# Altium PCB Kivipallur_plaat.PcbDoc
Units mm, origin at the board's own origin, x right, y up, seen from the top; angles counter-clockwise.
Board outline 64.78 x 80 mm, 4 copper layers (Top Layer, GND, GND_M, Bottom Layer), stack 1.586 mm thick; 108 components, 69 nets, 364 pads, 341 vias.
Unrouted connection lines stored in the file: 5.
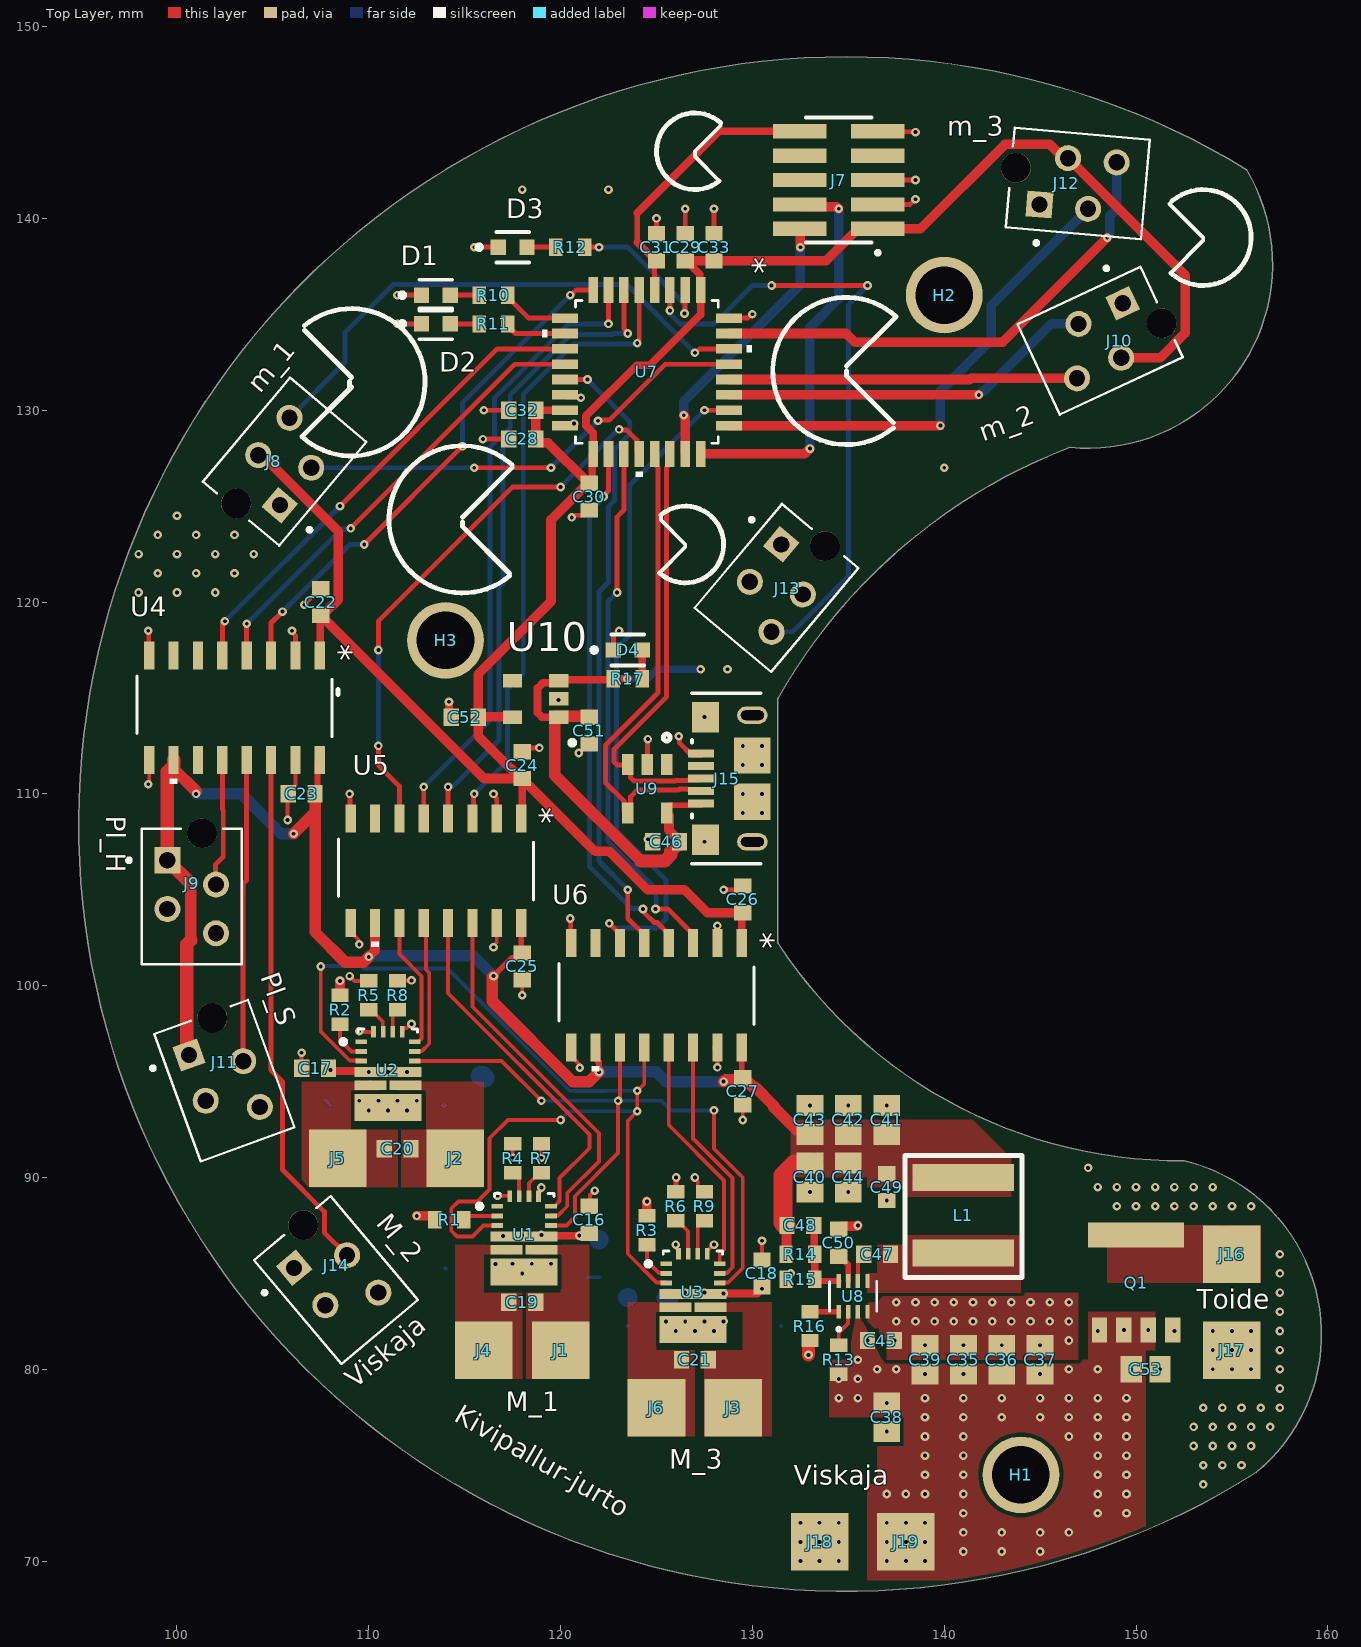
[diagram p0: Top Layer view]
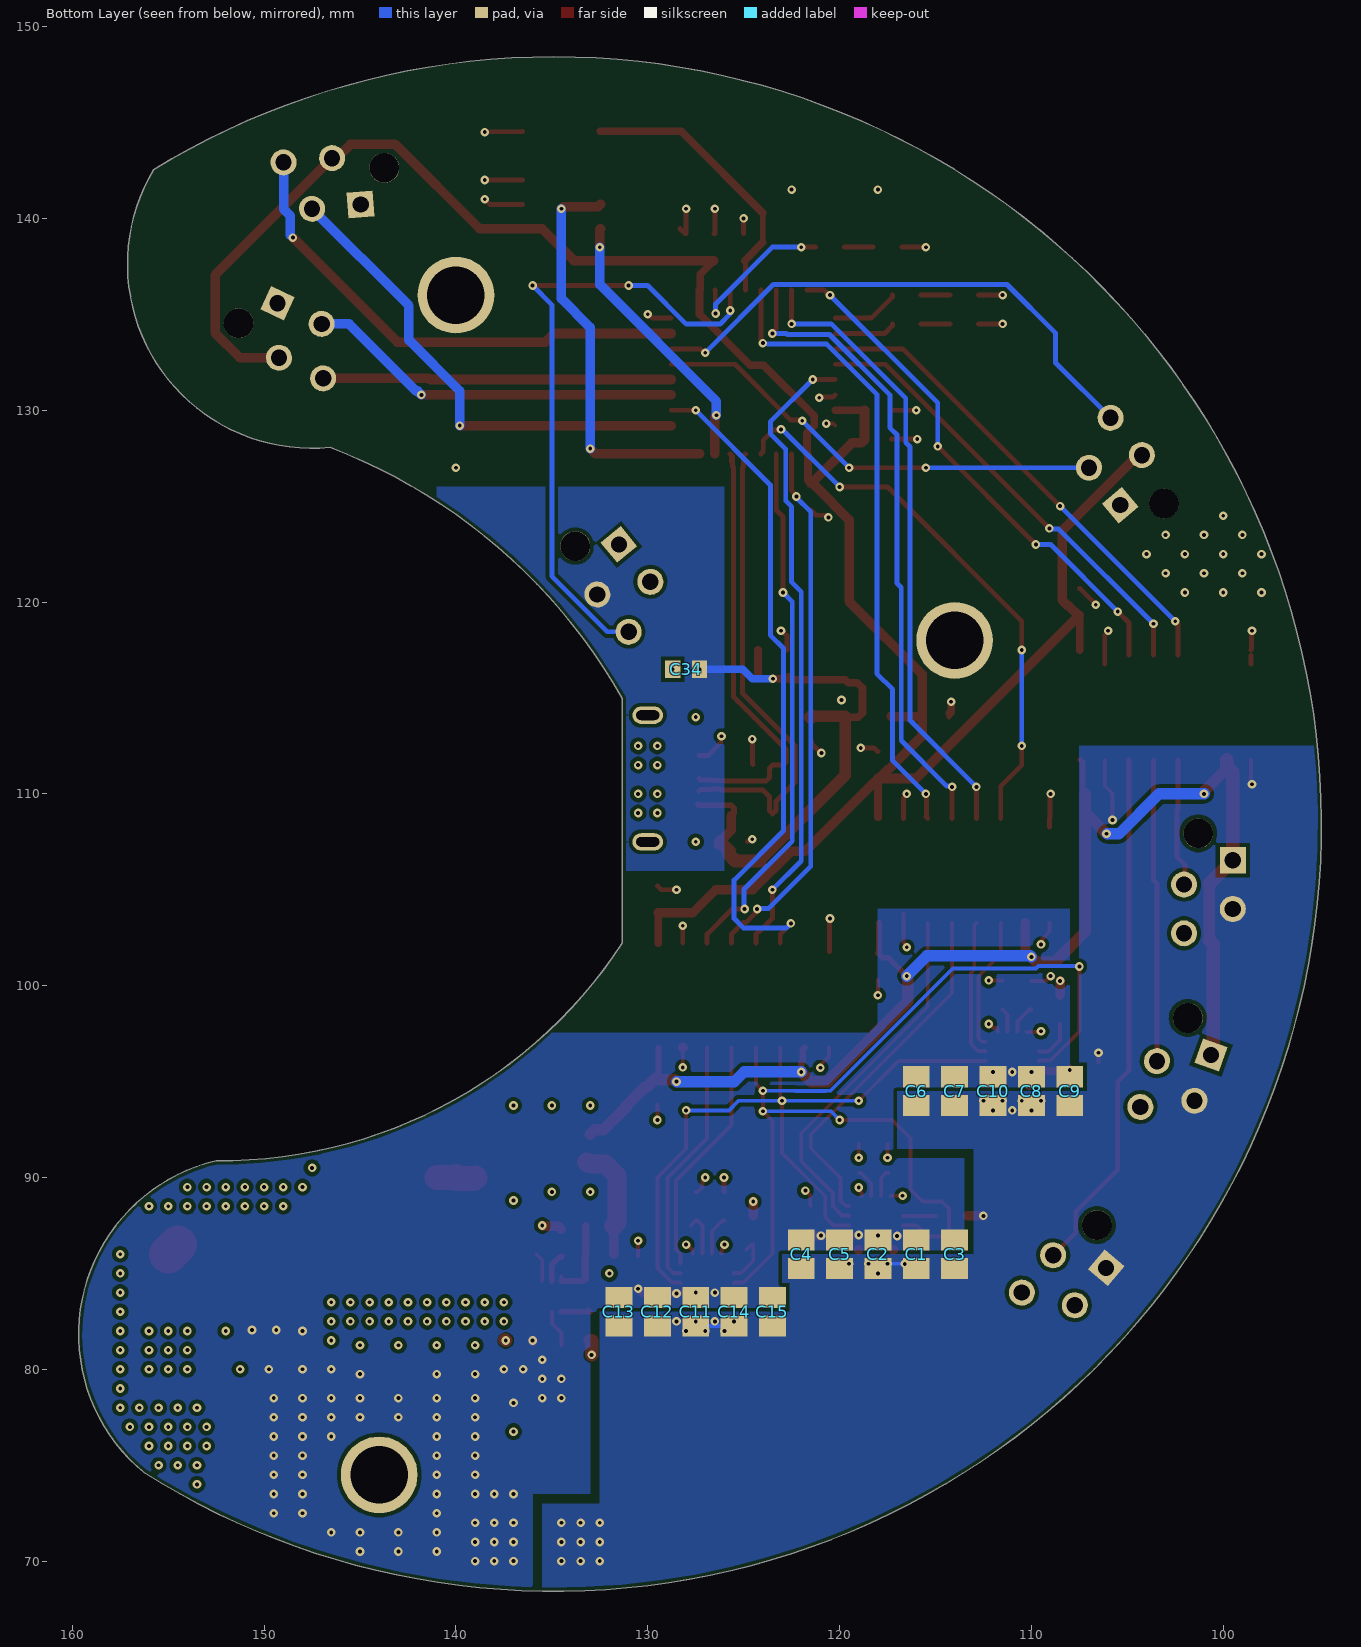
[diagram p1: Bottom Layer view, seen from below]
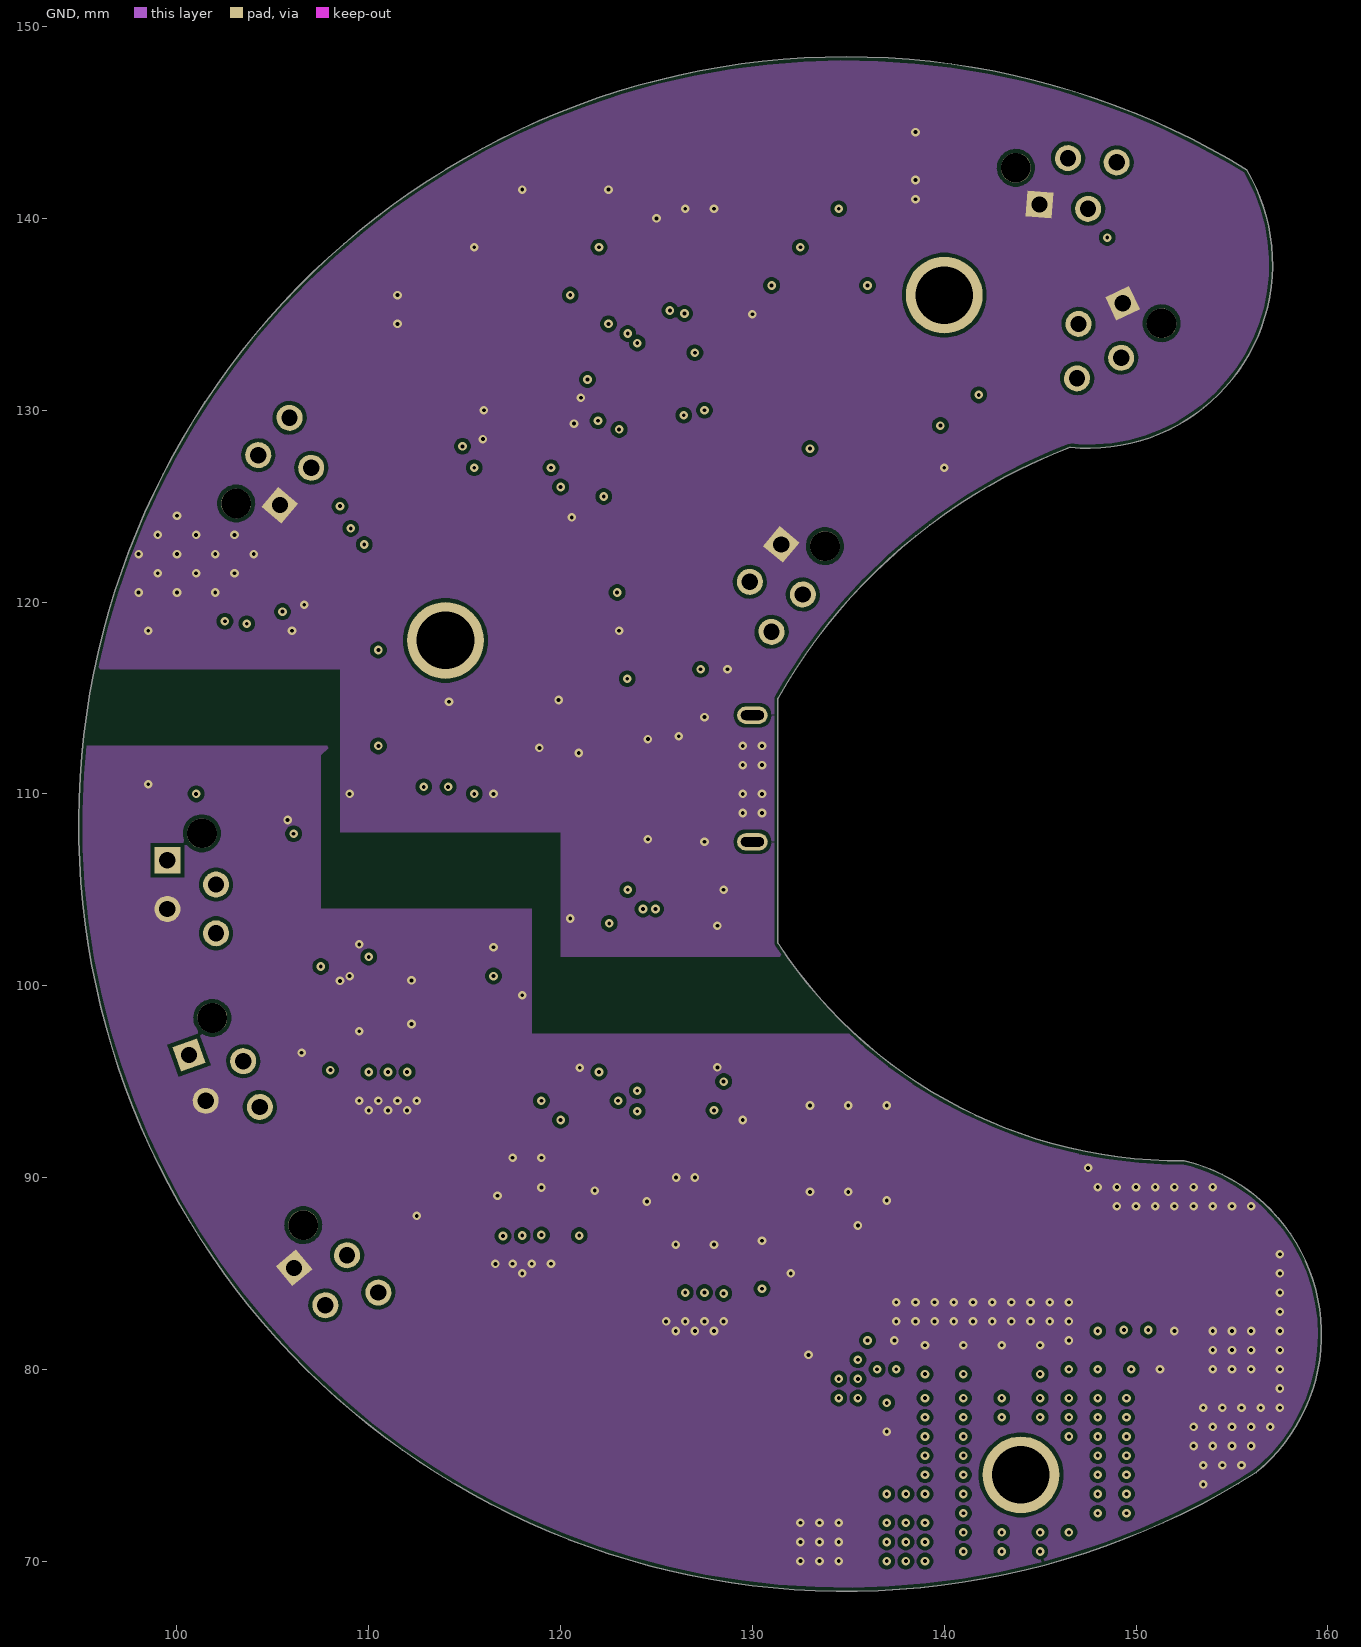
[diagram p2: GND]
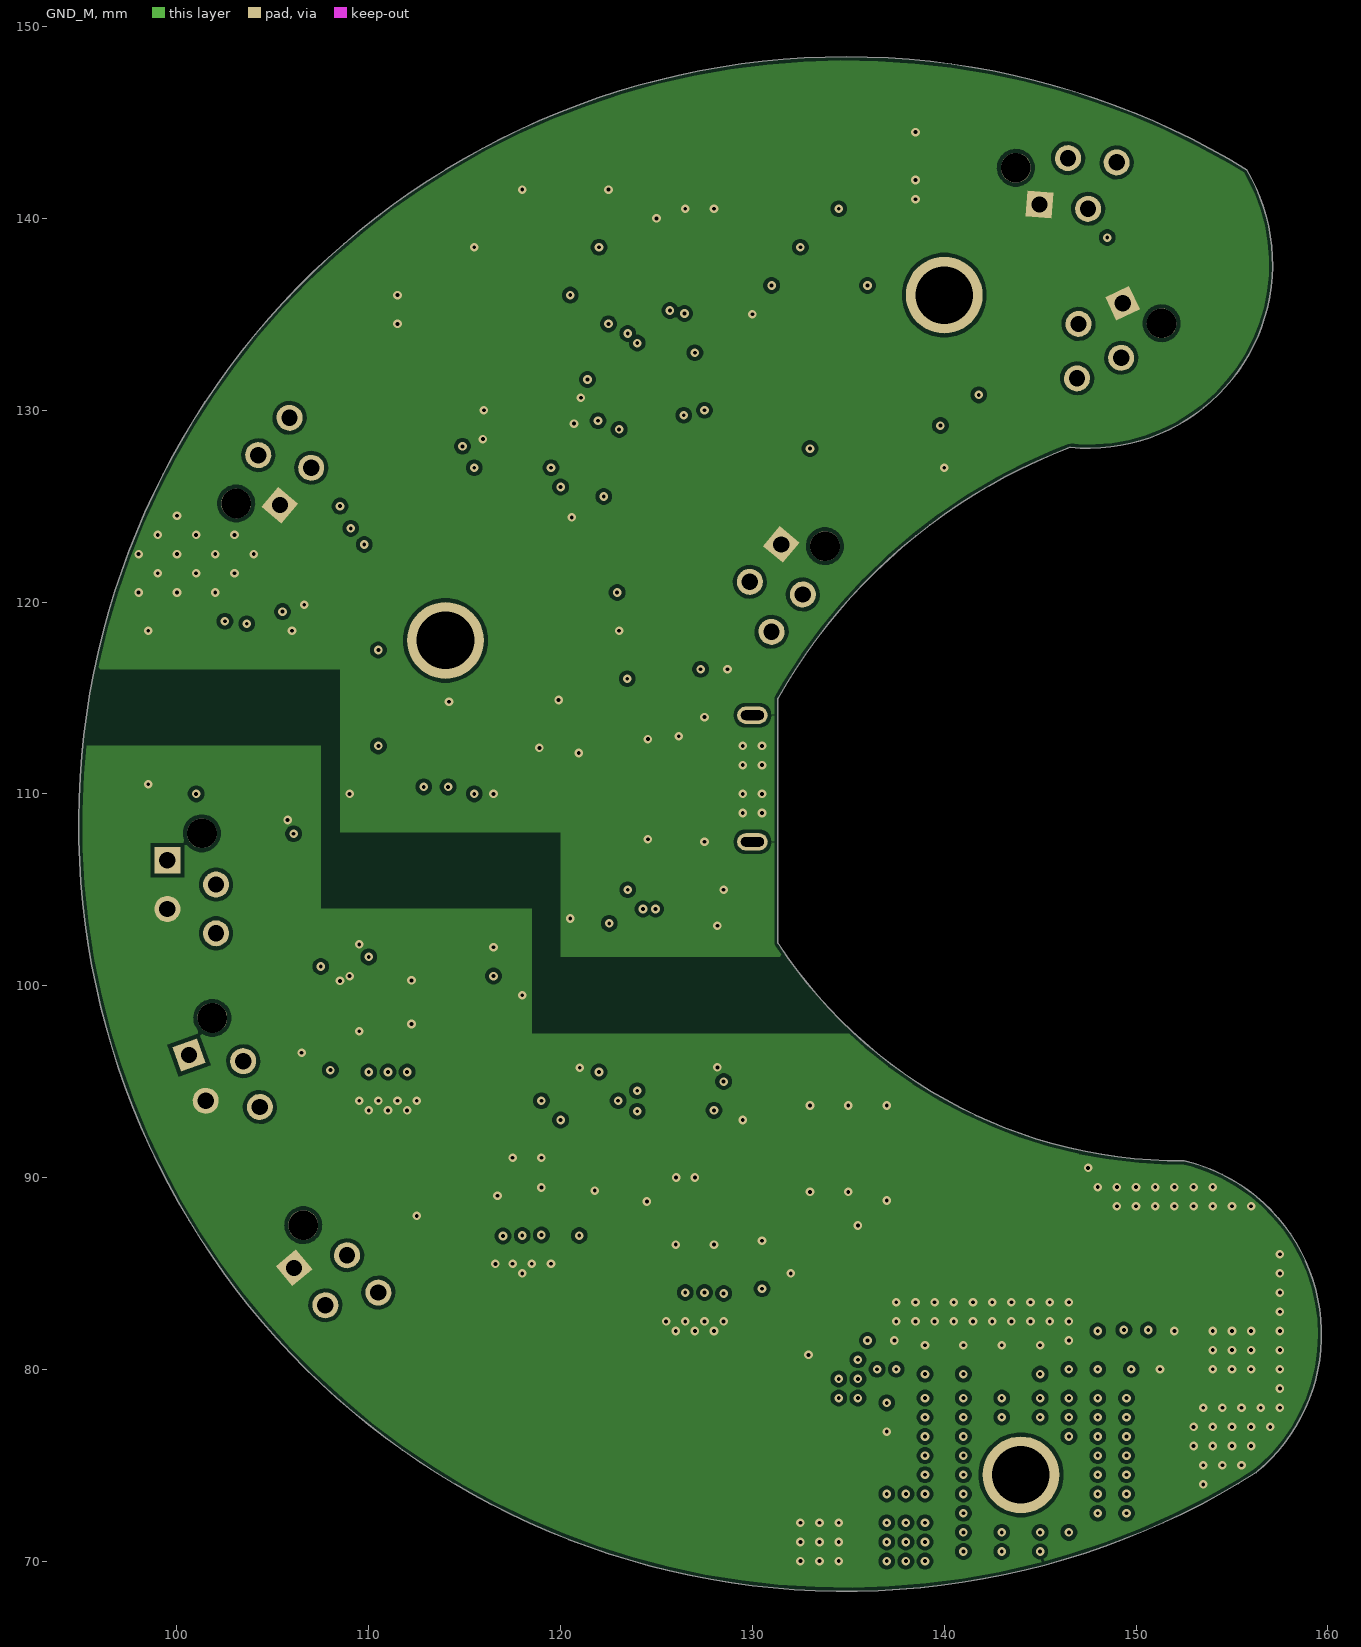
[diagram p3: GND_M]

## Layer stack, top to bottom
Top Solder: solder mask 0.0102, Solder Resist, Dk 3.5
Top Layer: signal copper 0.035
Dielectric 2: prepreg 0.2104, PP-006, Dk 4.1
GND: signal copper 0.0152
Dielectric 1: dielectric 1.065, FR-4, Dk 4.8
GND_M: signal copper 0.0152
Dielectric 3: prepreg 0.2104, PP-006, Dk 4.1
Bottom Layer: signal copper 0.035
Bottom Solder: solder mask 0.0102, Solder Resist, Dk 3.5

## Board outline
131.332,102.217 ccw(c152.273,115.874) 152.5,90.875 cw(c150.361,81.818) 156.258,74.619 cw(c134.88,108.427) 155.76,142.545 cw(c147.516,137.619) 146.563,128.063 ccw(c157.091,100.398) 131.332,114.982

## Design rules (kind name [scope] priority, off if disabled: settings)
AssemblyTestpoint [All] p1: testpointundercomponent=TRUE minsize=1.016 maxsize=6.3 preferedsize=1.524 minholesize=0 maxholesize=3 preferedholesize=0.2 testpointgrid=0.025 usegrid=TRUE gridtolerance=0 allowsidetop=TRUE allowsidebottom=TRUE
BoardOutlineClearance [All] p1: gap=0.2 ignorepadtopadclearanceinfootprint=FALSE except(0: Arc-SplitContinuation Track-SplitContinuation SMDPad-SplitContinuation THPad-SplitContinuation Via-SplitContinuation Fill-SplitContinuation Poly-SplitContinuation Region-SplitContinuation Text-SplitContinuation)
Clearance [All] p1: gap=0.2 ignorepadtopadclearanceinfootprint=TRUE
DiffPairsRouting DiffPairsRoutingUSB [InDifferentialPairClass('USB')] p1: maxlimit=0.2 minlimit=0.2 mostfreqgap=0.2 toplayer_minwidth=0.26 toplayer_maxwidth=0.26 toplayer_prefwidth=0.26 midlayer1_minwidth=0.26 midlayer1_maxwidth=0.26 midlayer1_prefwidth=0.26 midlayer2_minwidth=0.26 midlayer2_maxwidth=0.26 midlayer2_prefwidth=0.26 bottomlayer_minwidth=0.26 bottomlayer_maxwidth=0.26 bottomlayer_prefwidth=0.26 maxuncoupledlength=12.7
FabricationTestpoint [All] p1: side=3 testpointundercomponent=TRUE minsize=1.016 maxsize=6.3 preferedsize=1.524 minholesize=0 maxholesize=3 preferedholesize=0.2 testpointgrid=0.025 allowsidetop=TRUE allowsidebottom=TRUE usegrid=TRUE gridtolerance=0
HoleSize [All] p1: absolutevalues=TRUE maxlimit=6.3 minlimit=0.025 maxpercent=80.000 minpercent=20.000
MinimumSolderMaskSliver [All] p1: minsoldermaskwidth=0.05
NetAntennae [All] p1: netantennaetolerance=0.254
PolygonConnect PolygonConnect_Net [InNetClass('All Nets')] p1: connectstyle=Direct reliefconductorwidth=0.254 reliefentries=4 polygonreliefangle="90 Angle" airgapwidth=0.254
PolygonConnect PolygonConnect_Via [IsVia] p2: connectstyle=Direct reliefconductorwidth=0.254 reliefentries=4 polygonreliefangle="90 Angle" airgapwidth=0.254
PolygonConnect [All] p3: connectstyle=Relief reliefconductorwidth=0.254 reliefentries=4 polygonreliefangle="90 Angle" airgapwidth=0.254
RoutingVias [All] p1: holewidth=0.2 width=0.45 viastyle="Through Hole" minholewidth=0.2 minwidth=0.4 maxholewidth=0.2 maxwidth=0.45
SilkToSolderMaskClearance [IsPad] p1: minsilkscreentomaskgap=0.15 clearancetoexposedcopper=TRUE
SolderMaskExpansion SolderMaskExpansionVia [IsVia] p1: expansion=0.102 istentingtop=TRUE
SolderMaskExpansion [All] p2: expansion=0.05 istentingtop=FALSE
UnpouredPolygon [All] p1: allowunpoured=TRUE allowshelved=TRUE
Width [All] p1: maxlimit=2 minlimit=0.2 preferedwidth=0.254
22 further rules are at their usual default settings.

## Classes and differential pairs
differential pair class USB: USB_D
component class U_Kivipallur_joonis3_toide: C35 C36 C38 C40 C41 C42 C44 C46 C47 C48 C50 C51 C52 C53 H1 H2 H3 J13 J16 J18 L1 Q1 R15 R17 U8 U9 U10
component class U_Kivipallur_joonis2_kontroller: C29 C31 C32 C34 D1 D2 D3 J7 J8 J9 J10 J11 J12 J16 R10 R11 R12 U7
component class U_Kivipallur_joonis1_mootor: C1 C2 C3 C4 C5 C6 C7 C8 C9 C10 C11 C12 C13 C14 C15 C16 C17 C18 C19 C20 C21 C22 C23 C24 C25 C26 C27 J1 J2 J3 J4 J5 J6 R1 R2 R3 R4 R5 R6 R7 R8 R9 U1 U2 U3 U4 U5 U6
differential pair USB_D: +USB_D_P -USB_D_N

## Components (designator, comment, footprint, x,y, rotation, side; value= is the part's Value field where it differs from the comment)
C1 "Cap Pol3" C0805 116,86 r270 bottom value=10uF
C2 "Cap Pol3" C0805 118,86 r270 bottom value=10uF
C3 "Cap Pol3" C0805 114,86 r270 bottom value=10uF
C4 "Cap Pol3" C0805 122,86 r270 bottom value=10uF
C5 "Cap Pol3" C0805 120,86 r270 bottom value=10uF
C6 "Cap Pol3" C0805 116,94.5 r270 bottom value=10uF
C7 "Cap Pol3" C0805 114,94.5 r270 bottom value=10uF
C8 "Cap Pol3" C0805 110,94.5 r270 bottom value=10uF
C9 "Cap Pol3" C0805 108,94.5 r270 bottom value=10uF
C10 "Cap Pol3" C0805 112,94.5 r270 bottom value=10uF
C11 "Cap Pol3" C0805 127.5,83 r270 bottom value=10uF
C12 "Cap Pol3" C0805 129.5,83 r270 bottom value=10uF
C13 "Cap Pol3" C0805 131.5,83 r270 bottom value=10uF
C14 "Cap Pol3" C0805 125.5,83 r270 bottom value=10uF
C15 "Cap Pol3" C0805 123.5,83 r270 bottom value=10uF
C16 "Cap Semi" 1608[0603] 121.5,87.8 r270 top value=0.1uF
C17 "Cap Semi" 1608[0603] 107.2,95.7 r0 top value=0.1uF
C18 "Cap Semi" 1608[0603] 130.5,85 r270 top value=0.1uF
C19 "Cap Semi" 1608[0603] 118,83.5 r0 top value=100nF
C20 "Cap Semi" 1608[0603] 111.5,91.5 r0 top value=100uF
C21 "Cap Semi" 1608[0603] 127,80.5 r0 top value=100nF
C22 "Cap Semi" 1608[0603] 107.5,120 r270 top value=0.1uF
C23 "Cap Semi" 1608[0603] 106.5,110 r180 top value=0.1uF
C24 "Cap Semi" 1608[0603] 118,111.5 r270 top value=0.1uF
C25 "Cap Semi" 1608[0603] 118,101 r270 top value=0.1uF
C26 "Cap Semi" 1608[0603] 129.5,104.5 r270 top value=0.1uF
C27 "Cap Semi" 1608[0603] 129.5,94.5 r270 top value=0.1uF
C28 "Cap Semi" 1608[0603] 118,128.5 r0 top value=4.7uF
C29 "Cap Semi" 1608[0603] 126.5,138.5 r270 top value=100nF
C30 "Cap Semi" 1608[0603] 121.5,125.5 r90 top value=100nF
C31 "Cap Semi" 1608[0603] 125,138.5 r270 top value=0.1uF
C32 "Cap Semi" 1608[0603] 118,130 r180 top value=100nF
C33 "Cap Semi" 1608[0603] 128,138.5 r90 top value=4.7uF
C34 "Cap Semi" 1608[0603] 128,116.5 r0 bottom value=4.7uF
C35 "Cap Pol3" C0805 141,80.5 r90 top value=10uF
C36 "Cap Pol3" C0805 143,80.5 r90 top value=10uF
C37 "Cap Pol3" C0805 145,80.5 r90 top value=10uF
C38 "Cap Pol3" C0805 137,77.5 r270 top value=10uF
C39 "Cap Pol3" C0805 139,80.5 r90 top value=10uF
C40 "Cap Pol3" C0805 133,90 r270 top value=10uF
C41 "Cap Pol3" C0805 137,93 r90 top value=10uF
C42 "Cap Pol3" C0805 135,93 r90 top value=10uF
C43 "Cap Pol3" C0805 133,93 r90 top value=10uF
C44 "Cap Pol3" C0805 135,90 r270 top value=10uF
C45 "Cap Semi" 1608[0603] 136.7,81.5 r0 top value=0.1uF
C46 "Cap Semi" 1608[0603] 125.5,107.5 r180 top value=0.1uF
C47 "Cap Semi" 1608[0603] 136.5,86 r0 top value=0.1uF
C48 "Cap Semi" 1608[0603] 132.5,87.5 r0 top value=10pF
C49 "Cap Semi" 1608[0603] 137,89.5 r270 top value=0.1uF
C50 "Cap Semi" 1608[0603] 134.5,86.6 r90 top value=1uF
C51 "Cap Semi" 1608[0603] 121.5,113.3 r270 top value=1uF
C52 "Cap Semi" 1608[0603] 115,114 r180 top value=1uF
C53 "Cap Pol3" C0805 150.5,80 r0 top value=10uF
D1 "LTST-C191TBKT" FP-LTST-C191TBKT-MFG 113.5,136 r0 top
D2 "LTST-C191TBKT" FP-LTST-C191TBKT-MFG 113.5,134.5 r0 top
D3 "LTST-C191TBKT" FP-LTST-C191TBKT-MFG 117.5,138.5 r0 top
D4 "LTST-C191TBKT" FP-LTST-C191TBKT-MFG 123.5,117.5 r0 top
H1 "Kruvi_auk" kruvi_auk 144,74.5 r0 top
H2 "Kruvi_auk" kruvi_auk 140,136 r0 top
H3 "Kruvi_auk" kruvi_auk 114,118 r0 top
J1 "3x3_mm" 3x3_mm 120,81 r0 top
J2 "3x3_mm" 3x3_mm 114.5,91 r0 top
J3 "3x3_mm" 3x3_mm 129,78 r0 top
J4 "3x3_mm" 3x3_mm 116,81 r0 top
J5 "3x3_mm" 3x3_mm 108.373,91 r0 top
J6 "3x3_mm" 3x3_mm 125,78 r0 top
J7 "FTSH-105-XX-X-DV" SAMTEC_FTSH-105-XX-X-DV 134.5,142 r90 top
J8 "215079-4" TE_215079-4 105.367,125.054 r230 top
J9 "215079-4" TE_215079-4 99.5,106.54 r90 top
J10 "215079-4" TE_215079-4 149.302,135.573 r25 top
J11 "215079-4" TE_215079-4 100.631,96.387 r110 top
J12 "215079-4" TE_215079-4 144.97,140.721 r175 top
J13 "215079-4" TE_215079-4 131.5,123 r50 top
J14 "215079-4" TE_215079-4 106.105,85.286 r130 top
J15 "USB" USB 129.168,110.8 r90 top
J16 "3x3_mm" 3x3_mm 155,86 r0 top
J17 "3x3_mm" 3x3_mm 155,81 r0 top
J18 "3x3_mm" 3x3_mm 133.5,71 r0 top
J19 "3x3_mm" 3x3_mm 138,71 r0 top
L1 "SRP6060FA-5R6M" "test alus" 149.763,87.206 r180 top
Q1 "BUK6Y10-30P" BUK6Y10-30P 150,87.635 r180 top
R1 "Res3" J1-0603 114.2,87.8 r0 top value=2.7k
R2 "Res3" J1-0603 108.5,98.75 r270 top value=2.7k
R3 "Res3" J1-0603 124.5,87.25 r270 top value=2.7k
R4 "Res3" J1-0603 117.5,91 r270 top value=47k
R5 "Res3" J1-0603 110,99.5 r270 top value=47k
R6 "Res3" J1-0603 126,88.5 r270 top value=47k
R7 "Res3" J1-0603 119,91 r270 top value=47k
R8 "Res3" J1-0603 111.5,99.5 r270 top value=47k
R9 "Res3" J1-0603 127.5,88.5 r270 top value=47k
R10 "Res3" J1-0603 116.5,136 r0 top value=3.3k
R11 "Res3" J1-0603 116.5,134.5 r0 top value=3.3k
R12 "Res3" J1-0603 120.5,138.5 r0 top value=3.3k
R13 "Res3" J1-0603 134.5,80.5 r270 top value=10k
R14 "Res3" J1-0603 132.5,86 r180 top value=53.6k
R15 "Res3" J1-0603 132.5,84.7 r0 top value=10.2k
R16 "Res3" J1-0603 133,82.25 r90 top value=47k
R17 "Res3" J1-0603 123.5,116 r0 top value=3.3k
U1 "PDRV8243HRXYQ1" RXY0014A-MFG 118.1,86.875 r0 top
U2 "PDRV8243HRXYQ1" RXY0014A-MFG 111,95.45 r0 top
U3 "PDRV8243HRXYQ1" RXY0014A-MFG 126.9,83.875 r0 top
U4 "MAX14930DASE+" 21-0041_S16+1_MXM 103,114.5 r270 top
U5 "MAX14930DASE+" 21-0041_S16+1_MXM 113.5,106 r270 top
U6 "MAX14930DASE+" 21-0041_S16+1_MXM 125,99.5 r270 top
U7 "STM32G441KBT3" LQFP32_7X7_STM 124.5,132 r270 top
U8 "XTPS62933DRLR" SOT_33DRLR_TEX 135.25,83.8 r90 top
U9 "USB protection" USB_PROTECTION_3 122.992,112.556 r270 top
U10 "NCP164" NCP164_2 121.24,116.855 r180 top

## Footprints (in the part's own frame and the unit in brackets; to place one, negate y for a bottom-side part, rotate by r counter-clockwise, add the part's x,y. Pads: shape width x height; smd on the part's side, far side on the other; paste and mask are expansions set on the pad)
3x3_mm [mm]
  rect 3x3 smd mask+0.102: 3x3_mm(0,0)
21-0041_S16+1_MXM [mil]
  rect 57.55x21 smd paste+0 mask+0: 1(-107.27,175) 2(-107.27,125) 3(-107.27,75) 4(-107.27,25) 5(-107.27,-25) 6(-107.27,-75) 7(-107.27,-125) 8(-107.27,-175) 9(107.27,-175) 10(107.27,-125) 11(107.27,-75) 12(107.27,-25) 13(107.27,25) 14(107.27,75) 15(107.27,125) 16(107.27,175)
  silkscreen extent -65,-200 156,200, body extent -122,-195 122,195, height 69
1608[0603] [mm] "Chip Capacitor, Body 1.6x0.8mm, IPC High Density"
  rect 0.8x0.9 smd: 1(-0.7,0) 2(0.7,0)
  body extent -0.87,-0.48 0.87,0.48, height 1.3
BUK6Y10-30P [mm]
  rect 5x1.3 smd: D(0,0.635)
  rect 0.8x1.3 smd: G(-1.905,5.588) S(-0.635,5.588) S(0.635,5.588) S(1.905,5.588)
  body extent -2.4,0.01 2.4,6.12, height 1
C0805 [mm] "Chip Capacitor, Body 2.0x1.3mm, IPC High Density"
  rect 1.1x1.4 smd: 1(-0.75,0) 2(0.75,0)
  body extent -1.1,-0.72 1.1,0.72, height 1.4
FP-LTST-C191TBKT-MFG [mm]
  rect 0.8x0.8 smd paste+0 mask+0: 1(-0.75,0) 2(0.75,0)
  silkscreen extent -1.87,-0.8 0.85,0.8, body extent -1.25,-0.55 1.25,0.55, height 0.25
J1-0603 [mm] "Chip Resistor, Body 1.6x0.8mm, IPC High Density"
  rect 0.7x0.9 smd: 1(-0.75,0) 2(0.75,0)
  body extent -0.85,-0.48 0.85,0.48, height 0.9
kruvi_auk [mm]
  round 4 hole 3: q(0,0)
LQFP32_7X7_STM [mm]
  rect 1.359x0.501 smd paste+0 mask+0: 1(-4.274,2.8) 2(-4.274,2) 3(-4.274,1.2) 4(-4.274,0.4) 5(-4.274,-0.4) 6(-4.274,-1.2) 7(-4.274,-2) 8(-4.274,-2.8) 17(4.274,-2.8) 18(4.274,-2) 19(4.274,-1.2) 20(4.274,-0.4) 21(4.274,0.4) 22(4.274,1.2) 23(4.274,2) 24(4.274,2.8)
  rect 0.501x1.359 smd paste+0 mask+0: 9(-2.8,-4.274) 10(-2,-4.274) 11(-1.2,-4.274) 12(-0.4,-4.274) 13(0.4,-4.274) 14(1.2,-4.274) 15(2,-4.274) 16(2.8,-4.274) 25(2.8,4.274) 26(2,4.274) 27(1.2,4.274) 28(0.4,4.274) 29(-0.4,4.274) 30(-1.2,4.274) 31(-2,4.274) 32(-2.8,4.274)
  silkscreen extent -3.72,-5.46 5.46,5.46, body extent -4.6,-4.6 4.6,4.6, height 1.6
NCP164_2 [mm]
  rect 1x0.7 smd: 1(1.34,2.855) 2(1.34,1.905) 3(1.34,0.955) 4(3.74,0.955) 5(3.74,2.855)
  silkscreen extent 0.51,4.06 0.76,4.32, body extent 1.27,0.38 3.81,3.43, height 0.75
RXY0014A-MFG [mm]
  rect 0.6x0.25 smd paste+0 mask-0.292: 1(-1.4,1.625) 2(-1.4,1.125) 3(-1.4,0.625) 8(1.4,0.625) 9(1.4,1.125) 10(1.4,1.625)
  rect 3.5x0.5 smd paste-1.737 mask-1.74: 4(0,0.05)
  rect 1.675x0.5 smd paste-0.825 mask-0.826: 5(-0.913,-0.65) 7(0.913,-0.65)
  rect 3.5x1.4 smd paste-1.737 mask-1.74: 6(0,-1.8)
  rect 0.25x0.6 smd paste+0 mask-0.292: 11(0.75,2.15) 12(0.25,2.15) 13(-0.25,2.15) 14(-0.75,2.15)
  silkscreen extent -2.45,1.5 1.55,2.3, body extent -1.5,-2.2 1.5,2.3, height 1
SAMTEC_FTSH-105-XX-X-DV [mm]
  rect 0.74x2.79 smd: 01(-2.54,-2.035) 02(-2.54,2.035) 03(-1.27,-2.035) 04(-1.27,2.035) 05(0,-2.032) 06(0,2.035) 07(1.27,-2.035) 08(1.27,2.035) 09(2.54,-2.035) 10(2.54,2.035)
  silkscreen extent -3.89,-2.13 3.26,1.72, body extent -3.3,-3.05 3.05,2.79, height 6.21
SOT_33DRLR_TEX [mil]
  rect 28x9 smd paste+0 mask+0: 1(-31.5,29.53) 2(-31.5,9.84) 3(-31.5,-9.85) 4(-31.5,-29.54) 5(31.5,-29.54) 6(31.5,-9.85) 7(31.5,9.84) 8(31.5,29.53)
  silkscreen extent -71,-48 31,48, body extent -34,-44 34,44, height 24
TE_215079-4 [mm]
  rect 1.358x1.358 hole 0.85: 1(0,0)
  round 1.358 hole 0.85: 2(-1.27,-2.54) 3(-2.54,0) 4(-3.81,-2.54)
  round 1.55 hole 1.55 unplated: ""(1.4,-1.8)
  silkscreen extent -5.43,-3.87 1.65,2.11
"test alus" [mm]
  rect 5.3x1.4 smd: 1(8.763,1.143) 2(8.763,-2.794)
  silkscreen extent 5.71,-3.94 11.81,2.41
USB [mm]
  rect 0.4x1.35 smd paste+0 mask+0: 1(-1.3,1.843) 2(-0.65,1.843) 3(0,1.843) 4(0.65,1.843) 5(1.3,1.843)
  rrect100% 0.9x1.6 hole 1.2 slot 0.5 at 0 deg paste-1000 mask+0: 8(-3.3,-0.832) 11(3.3,-0.832)
  rect 1.6x1.4 smd paste+0 mask+0: SH(-3.2,1.618) SH(3.2,1.618)
  rect 1.9x1.9 smd paste+0 mask+0: SH(-1.2,-0.832) SH(1.2,-0.832)
  silkscreen extent -4.44,-1.27 4.44,2.33, body extent -4.13,-3.94 4.13,2.62, height 0.25
USB_PROTECTION_3 [mm]
  rect 1.1x0.6 smd: 1(1.016,2.54) 2(1.016,1.524) 3(1.016,0.508) 4(3.556,0.508) 5(3.556,2.54)
  silkscreen extent -0.56,2.36 -0.2,2.72, body extent 1.02,0.51 3.56,2.54, height 2.92

## Part data
C1 C2 C3 C4 C5 C6 C7 C8 C9 C10 C11 C12 C13 C14 C15 C35 C36 C37 C38 C39 C40 C41 C42 C43 C44 C53: "Polarized Capacitor (Surface Mount)", LatestRevisionDate=29-May-2009, LatestRevisionNote="IPC-7351 Footprint Added.", PackageDescription="Chip Capacitor", PackageReference=C0805, Published=8-Jun-2000, Publisher="Altium Limited"
C16 C17 C18 C19 C20 C21 C22 C23 C24 C25 C26 C27 C28 C29 C30 C31 C32 C33 C34 C45 C46 C47 C48 C49 C50 C51 C52: "Capacitor (Semiconductor SIM Model)", LatestRevisionDate=29-May-2009, LatestRevisionNote="IPC-7351 Footprint Added.", PackageDescription="Chip Capacitor", PackageReference=C1206, Published=8-Jun-2000, Publisher="Altium Limited"
D1 D2 D3 D4: library part CMP-22017-000008-1, "LED BLUE CLEAR CHIP SMD", Case Code (Imperial)=0603, Case Code (Metric)=1608, Color=Blue, Forward Current=20mA, Forward Voltage=3.8V, Lens Color=Colorless, Max Operating Temperature=80°C, Max Power Dissipation=75mW, Min Operating Temperature=-20°C, Package Quantity=1, Power Dissipation=76mW, Reverse Voltage=5V, Case/Package=0603, Depth=1.6mm, Dominant Wavelength=475nm, Height=0.55mm, Illumination Color=Blue, Lead Free="Lead Free", Length=0.8mm, Lens Style=Diffused, Lens Transparency=Clear, Luminous Intensity=180mcd, Mount="Surface Mount", Number of Elements=1, Number of LEDs=1, Number of Pins=2, Packaging="Tape and Reel", Radiation Hardening=No, Test Current=20mA, Viewing Angle=130°, Wavelength=468nm, Width=0.8mm
J7: "Connector Header Surface Mount 10 position 0.050\" (1.27mm)", Package=None, Availability=Unavailable, MP=FTSH-105-XX-X-DV, Price=None
J8 J9 J10 J11 J12 J13 J14: "4 Position Receptacle Connector Through Hole", Package="SMD-6 Omron Electronics", Availability=Unavailable, EU_RoHS_Compliance=Compliant, MF="TE Connectivity", MP=215079-4, Price=None, SnapEDA_Link=https://www.snapeda.com/parts/215079-4/TE%20Connectivity%20AMP%20Connectors/view-part/2366486/?ref=snap, TE_purchase_URL=https://www.te.com/usa-en/product-215079-4.html?te_bu=Cor&te_type=disp&te_campaign=seda_glo_cor-seda-global-disp-prtnr-fy19-seda-model-bom-cta_sma-317_1&elqCampaignId=32493
R1 R2 R3 R4 R5 R6 R7 R8 R9 R10 R11 R12 R13 R14 R15 R16 R17: "Resistor", LatestRevisionDate=29-May-2009, LatestRevisionNote="IPC-7351 Footprint Added.", PackageDescription="Chip Resistor", PackageReference=J1-0603, Published=8-Jun-2000, Publisher="Altium Limited"
U1 U2 U3 U8: "No Description Available", Mfr_Name="Texas Instruments", Copyright="Copyright (C) 2022 Ultra Librarian. All rights reserved.", RefDes=RefDes, Type=DEV
  U1 U2 U3: Manufacturer_Part_Number=PDRV8243HRXYQ1
  U8: Manufacturer_Part_Number=XTPS62933DRLR
U4 U5 U6: library part MAX14930DASE+_1, "No Description Available", Mfr_Name="Maxim Integrated Products", Copyright="Copyright (C) 2022 Ultra Librarian. All rights reserved.", Manufacturer_Part_Number=MAX14930DASE+, RefDes=RefDes, Type=DEV
U7: "No Description Available", Mfr_Name=STMicroelectronics, Copyright="Copyright (C) 2022 Ultra Librarian. All rights reserved.", Manufacturer_Part_Number=STM32G441KBT3, RefDes=RefDes, Type=DEV

## Via types
v1: diameter 0.45, hole 0.2, Top Layer to Bottom Layer, tented both sides, 341 vias

## Nets (pads, with @x,y where several pads share a name; then routed paths per layer and width w, separated by ;. In a path a pad name is that pad's centre, name@x,y a point inside that pad or via, vN(x,y) a via of type N, cw(c..) or ccw(c..) an arc to the next point about the centre after c; other vN are vias at no path point)
+3.3V: C22.2 C24.2 C26.2 C28.2 C29.2 C30.2 C32.1 C33.1 C52.1 J7.01 J8.2 J10.2 J12.2 U4.1 U5.1 U6.1 U7.1 U7.15 U7.17 U10.5 | length 124.1
  Top Layer w0.3: U5.1 U5.1@118,108.78
  Top Layer w0.4: U4.1@107.473,117.5 C22.2@107.473,119.272 ; U5.1@118,108.78 C24.2 ; C32.1 U7.15 ; C30.2 121.65,126.35 121.65,127.676 U7.17 121.7,128.812 121.323,129.189 121.323,129.707 123.967,132.35 124.656,132.35 127.3,134.994 U7.1 127.258,136.316 127.258,137.092 C29.2@126.55,137.8 ; U6.1 C26.2@129.445,103.8
  Top Layer w0.5: J8.2 104.438,127.66 108.4,123.698 108.4,120.114 108.09,119.804 108.054,119.804 107.55,119.3 C22.2 ; C22.2@107.7,119.114 116.014,110.8 C24.2@117.95,110.8 ; U10.5@117.3,114.05 117.275,114.025 115.725,114.025 C52.1 ; C24.2 C24.2@117.95,110.8 ; C24.2@118.2,110.6 121.8,107 122.541,107 124.541,105 126.455,105 127.655,103.8 C26.2@129.445,103.8 ; C32.1 C28.2 118.7,128.45 118.85,128.3 119.35,128.3 121.45,126.2 C30.2 ; C30.2@121.264,126.05 119.5,124.286 119.5,120.035 115.7,116.235 C52.1 ; C29.2@126.55,137.8 C33.1 133.85,137.8 135.51,139.46 J7.01 138.759,139.46 143.16,143.862 145.504,143.862 146.224,143.141 J12.2 152.557,137.041 152.557,134.026 151.265,132.735 J10.2 ; C52.1 115.7,113.014 117.41,111.304 117.446,111.304 C24.2@117.95,110.8
+5V: C23.1 C25.1 C27.1 C40.1 C41.1 C42.1 C43.1 C44.1 C48.1 C49.1 J9.1 J11.1 L1.2 R14.2 U4.10 U4.16 U5.10 U5.16 U6.10 U6.16 | length 82.9
  Top Layer w0.3: C23.1 107.328,110.128 107.328,111.659 U4.16 ; v1(116.5,100.5) 117.45,101.45 117.75,101.45 C25.1 ; C25.1@117.945,101.755 U5.16 ; C27.1@129.445,95.255 U6.16
  Top Layer w0.333: U6.10 121.925,96.675 121.925,96.075 122,96 v1(122,95.5)
  Top Layer w0.4: U4.10@99.825,111.311 U4.10@99.825,111.478 ; v1(101,110) v1@101,110.136
  Top Layer w0.5: v1(110,101.5) 110.325,101.825 U5.10 ; R14.2 131.775,86.025 C48.1@131.775,87.475
  Top Layer w0.6: U4.10@99.825,111.311 v1@101,110.136 ; 100.717,102.367 100.717,105.323 ; v1(106.081,107.919) 107.2,109.038 ; C23.1 107.2,109.038 ; v1(110,101.5) 109.725,101.225 108.775,101.225 107.2,102.8 107.2,109.038 ; v1(116.5,100.5) 116.444,100.444 116.444,99.181 120.626,95 121.5,95 v1(122,95.5) ; v1(128.5,95) 128.6,95.1 129.4,95.1 C27.1 ; C27.1@129.55,95.2 130.05,94.7 130.157,94.7 131.125,93.732 131.125,93.668 132.293,92.5 132.75,92.5 C43.1
  Top Layer w0.7: U4.10 99.825,111.478 99.5,111.153 J9.1 100.717,105.323 ; J11.1 100.519,96.499 100.519,102.169 100.717,102.367
  Top Layer w1: C48.1@131.775,87.475 131.6,87.65 131.6,90.09 132.21,90.7 132.95,90.7 C40.1 ; C40.1@133.15,90.75 C40.1@133.2,90.8
  Top Layer w1.3: L1.2@139,89.987 139.05,89.937 L1.2@140.05,89.937 ; L1.2@140,90.05 140.05,90 L1.2
  Bottom Layer w0.4: v1@106.058,107.91 106.067,107.919 v1(106.081,107.919)
  Bottom Layer w0.6: v1(101,110) 103.345,110 105.435,107.91 v1@106.058,107.91 ; v1(110,101.5) 110.05,101.55 115.45,101.55 v1(116.5,100.5) ; v1(122,95.5) 124.98,95.5 125.48,95 v1(128.5,95)
+5V_USB: C34.1 C46.1 C51.1 J13.2 J15.1 R17.1 U9.5 U10.1 U10.3 | length 29.9
  Top Layer w0.3: U9.5@125.65,108.85 125.5,109 125.5,109.25 125.65,109.4 127.325,109.4 J15.1@127.375,109.45 ; C46.1@126.2,107.55 C46.1 C46.1@126.419,107.281
  Top Layer w0.4: U10.1@120.123,114 U10.1 119.7,114 119.034,114 118.8,114.234 118.8,115.516 119.084,115.8 119.55,115.8 119.7,115.95 122.6,115.95 122.65,116 122.65,116.1 R17.1 v1(123.475,116)
  Top Layer w0.5: U9.5@125.65,108.85 125.65,108.1 C46.1@126.2,107.55
  Top Layer w0.6: C51.1@121.45,114.05 120.43,114.05 119.7,114.05 119.7,114 119.7,110.972 124.172,106.5
  Top Layer w0.7: C51.1@121.45,114.05 C51.1 ; 124.172,106.5 125.428,106.5 125.75,106.822 125.75,107 126.2,107.45 C46.1
  Bottom Layer w0.4: v1(123.475,116) 124.552,116 125.052,116.5 v1(127.3,116.5)
Debug_NRST: C31.2 J7.10 U7.4 | length 14.7
  Top Layer w0.254: U7.4 124.9,137.7 C31.2 C31.2@124.95,137.8
  Top Layer w0.3: 124,138.75 124,140.281
  Top Layer w0.4: 124,138.75 C31.2@124.95,137.8 ; 124,140.281 128.259,144.54 J7.10
Debug_SWCLIK: J7.04 U7.24 | length 21.1
  Top Layer w0.5: U7.24 132.726,127.726 v1(133,128) ; J7.04 132.585,140.61 134.39,140.61 v1(134.5,140.5)
  Bottom Layer w0.5: v1(133,128) 133,134.316 134.5,135.816 v1(134.5,140.5)
Debug_SWDIO: J7.02 U7.23 | length 14.3
  Top Layer w0.5: v1(126.423,129.739) 126.5,129.662 U7.23 ; J7.02 132.5,139.425 v1(132.5,138.5)
  Bottom Layer w0.5: v1(126.423,129.739) 126.423,130.468 132.5,136.545 v1(132.5,138.5)
GND: C22.1 C24.1 C26.1 C28.1 C29.1 C30.1 C31.1 C32.2 C33.2 C34.2 C46.2 C51.2 C52.2 D1.1 D2.1 D3.1 D4.1 J7.03 J7.05 J7.09 J8.1 J10.1 J12.1 J13.1 J15.5 J15.SH U4.2 U4.8 U5.2 U5.8 U6.2 U6.8 U7.14 U7.16 U7.32 U9.2 U10.2 | length 38.9
  Top Layer w0.2: U7.16 120.331,129.304 v1(120.698,129.304)
  Top Layer w0.254: v1(98.5,118.5) 98.528,118.472 98.528,117.527 U4.8@98.555,117.5 ; U4.8@98.555,116.761 U4.8 ; v1(106,118.5) 106,118.447 106.175,118.272 U4.2@106.175,116.761 ; v1(106.64,119.86) 106.64,119.89 107.45,120.7 C22.1 ; v1(109,110) 109.028,109.973 109.028,108.752 U5.8 U5.8@109.055,108.261 ; v1(111.5,134.5) D2.1 ; v1(111.5,136) D1.1 ; C52.2@114.273,114.215 114.3,114.188 C52.2 ; v1(115.5,138.5) D3.1 ; v1(115.951,128.495) 117.295,128.495 C28.1 ; v1(116,130) C32.2 C32.2@117.3,129.95 ; v1(116.5,110) 116.5,109.947 116.675,109.772 U5.2 ; C24.1 118.196,112.396 v1(118.896,112.396) ; U7.14 120.341,130.686 121.018,130.686 v1(121.056,130.648) ; v1(120.5,103.5) 120.528,103.472 U6.8@120.528,101.788 ; v1(120.584,124.416) 120.637,124.416 120.748,124.527 121.227,124.527 C30.1 ; v1(120.948,112.132) 120.982,112.132 121.448,112.598 C51.2@121.448,112.748 ; D4.1 122.75,118.25 123,118.5 v1(123.052,118.5) ; U9.2 124.534,111.558 124.534,112.834 v1(124.552,112.852) ; v1(124.552,107.634) 124.666,107.634 C46.2 ; C31.1 v1(125,140) ; v1(126.156,113) 126.194,112.962 126.194,112.656 126.85,112 J15.5@127.325,112 ; v1(126.5,140.5) C29.1 C29.1@126.55,139.2 ; v1(127.5,107.5) J15.SH@127.55,107.5 ; v1(127.5,114) 127.5,113.952 J15.SH@127.551,113.901 ; v1(128,140.5) C33.2 128.05,139.2 C33.2@128.323,139.473 ; U6.2 v1(128.175,103.125) ; v1(128.5,105) 129.3,105 C26.1 ; U7.32 129.761,134.8 129.961,135 v1(130,135) ; J7.05 v1(138.5,142) ; J7.03 138.23,140.73 v1(138.5,141) ; J7.09 136.555,144.52 138.48,144.52 v1(138.5,144.5)
  Top Layer w0.4: v1(114.183,114.803) 114.183,114.25 114.218,114.215 C52.2@114.273,114.215
  other v1: 129.5,109 130.5,109 129.5,110 130.5,110 129.5,111.5 130.5,111.5 129.5,112.5 130.5,112.5 119.896,114.896 128.7,116.5 98,120.5 100,120.5 102,120.5 99,121.5 101,121.5 103,121.5 98,122.5 100,122.5 102,122.5 104,122.5 99,123.5 101,123.5 103,123.5 100,124.5 140,127 118,141.5 122.5,141.5
GND_M: C1.2 C2.2 C3.2 C4.2 C5.2 C6.2 C7.2 C8.2 C9.2 C10.2 C11.2 C12.2 C13.2 C14.2 C15.2 C16.1 C17.1 C18.1 C23.2 C25.2 C27.2 C35.2 C36.2 C37.2 C38.2 C39.2 C40.2 C41.2 C42.2 C43.2 C44.2 C45.2 C49.2 C50.2 C53.2 J9.3 J11.3 J14.1 J17.3x3_mm J18.3x3_mm Q1.G R1.1 R2.1 R3.1 R4.1 R5.1 R6.1 R7.1 R8.1 R9.1 R15.1 R16.1 U1.6 U1.11 U1.14 U2.6 U2.11 U2.14 U3.6 U3.11 U3.14 U4.9 U4.15 U5.9 U5.15 U6.9 U6.15 U8.4 | length 33.7
  Top Layer w0.2: v1@98.555,110.555 U4.9 ; v1(105.771,108.635) 105.771,109.971 C23.2 105.8,110.05 106.175,110.425 U4.15 ; C17.1@106.5,96 v1(106.5,96.5) ; v1(109,100.5) 109.25,100.25 R5.1 ; U5.9 109.055,102.811 109.452,102.414 109.452,102.198 v1(109.5,102.15) ; v1(109.5,97.625) 109.542,97.583 110.083,97.583 ; U2.14@110.233,97.583 U2.14 ; R8.1 111.525,100.275 v1(112.225,100.275) ; U2.11 111.75,97.775 111.775,97.8 111.983,97.8 112.183,98 v1(112.225,98) ; v1(116.5,102) 116.5,102.068 116.675,102.243 U5.15 U5.15@116.675,103.739 ; v1(116.712,89.05) 117.325,89.05 U1.14 ; v1(117.5,91.025) R4.1 ; U1.6@118,84.975 U1.6 ; v1(118,99.5) C25.2 ; U1.11 118.85,89.2 118.952,89.302 118.952,89.427 v1(119,89.475) ; v1(119,91.025) R7.1 ; U6.9 120.555,96.311 120.952,95.914 120.952,95.773 v1(121,95.725) ; C16.1 121.525,88.525 121.525,89.083 121.758,89.316 v1(121.784,89.316) ; v1@126.025,86.5 v1(126,86.5) 126.048,86.452 126.048,86.302 126.15,86.2 U3.14 ; v1(127,90) 127,89.932 127.15,89.782 127.15,89.5 127.4,89.25 R9.1 ; U3.11 127.65,86.2 127.95,86.5 v1(128,86.5) ; v1(128.175,95.743) U6.15 ; v1(129.5,93) C27.2 ; C18.1@130.5,85.9 v1(130.5,86.7) ; v1@135.45,87.5 v1(135.5,87.5)
  Top Layer w0.254: R6.1 126.025,89.275 v1(126.025,90)
  Top Layer w0.5: R2.1 v1(108.5,100.25) ; v1(112.5,88) R1.1@113.35,88 ; R3.1 v1(124.5,88.75) ; U6.15@128.158,96.759 U6.15 ; C50.2 134.65,87.45 135.45,87.45 v1(135.5,87.5)
  Top Layer w0.7: v1(132.925,80.75) 132.925,81.5 R16.1 ; v1(137.4,81.5) C45.2@137.45,81.55
  Bottom Layer w0.2: C9.2@107.75,94 C9.2 ; C8.2 v1(110,93.5) 110.275,93.5 C8.2@110.475,93.3 ; v1(112,93.5) C10.2 ; C7.2@113.85,93.75 C7.2 ; C1.2@116.523,85.498 116.523,85.5 v1(117.5,85.5) 117.75,85.5 C2.2 ; C4.2@121.4,84.8 C4.2@122,84.8 ; v1(125.5,82.5) C14.2 127,82.25 C11.2
  Bottom Layer w0.5: v1(127,82) 127.075,82.075 127.325,82.075 C11.2
  other v1: 132.5,70 133.5,70 134.5,70 132.5,71 133.5,71 134.5,71 132.5,72 133.5,72 134.5,72 153.5,74 153.5,75 154.5,75 155.5,75 153,76 154,76 155,76 156,76 137,76.75 153,77 154,77 155,77 156,77 157,77 153.5,78 154.5,78 155.5,78 156.5,78 157.5,78 157.5,79 151.25,80 154,80 155,80 156,80 157.5,80 154,81 155,81 156,81 157.5,81 139,81.25 141,81.25 143,81.25 145,81.25 146.5,81.5 126,82 128,82 152,82 154,82 155,82 156,82 157.5,82 126.5,82.5 127.5,82.5 128.5,82.5 137.5,82.5 138.5,82.5 139.5,82.5 140.5,82.5 141.5,82.5 142.5,82.5 143.5,82.5 144.5,82.5 145.5,82.5 146.5,82.5 157.5,83 137.5,83.5 138.5,83.5 139.5,83.5 140.5,83.5 141.5,83.5 142.5,83.5 143.5,83.5 144.5,83.5 145.5,83.5 146.5,83.5 157.5,84 118,85 132,85 157.5,85 116.6,85.498 118.5,85.5 119.5,85.5 157.5,86 149,88.5 150,88.5 151,88.5 152,88.5 153,88.5 154,88.5 155,88.5 156,88.5 137,88.8 133,89.25 135,89.25 148,89.5 149,89.5 150,89.5 151,89.5 152,89.5 153,89.5 154,89.5 147.5,90.5 111,93.5 133,93.75 135,93.75 137,93.75 109.5,94 110.5,94 111.5,94 112.5,94 98.5,110.5
LED_B1: R12.2 U7.2 | length 8.2
  Top Layer w0.254: R12.2 v1(122,138.5) ; v1(126.461,135.039) 126.481,135.058 126.481,136.254 U7.2
  Bottom Layer w0.254: v1(122,138.5) 123.5,138.5 126.461,135.539 v1(126.461,135.039)
LED_B2: J13.4 U7.3 | length 33.4
  Top Layer w0.254: v1(125.7,135.2) U7.3 ; v1(131,136.5) v1(136,136.5)
  Bottom Layer w0.254: v1(125.7,135.2) 125.7,135.019 126.232,134.487 127.987,134.487 130,136.5 v1(131,136.5) ; J13.4 132.106,118.449 135,121.342 135,135.5 v1(136,136.5)
LED_R1: R10.2 U7.9 | length 3.5
  Top Layer w0.254: R10.2 117.25,135.9 118.35,134.8 U7.9
LED_R2: R11.2 U7.10 | length 3.2
  Top Layer w0.254: R11.2 117.25,134.4 117.65,134 U7.10
Mikro-m1-en1: J8.3 U7.29 | length 24
  Top Layer w0.254: v1(115.5,127) v1(119.5,127) ; v1(121.948,129.448) 121.986,129.486 122.537,129.486 125.451,132.4 U7.29
  Bottom Layer w0.254: J8.3 v1(115.5,127) ; v1(119.5,127) v1(121.948,129.448)
Mikro-m1-en2: J8.4 U7.30 | length 28.2
  Top Layer w0.254: v1(127,133) 127.053,133 127.253,133.2 U7.30
  Bottom Layer w0.254: J8.4 108.751,132.486 108.751,134.032 111.271,136.552 123.448,136.552 v1(127,133)
Mikro-m2-en1: J10.3 U7.27 | length 19.8
  Top Layer w0.5: U7.27 v1(141.8,130.8)
  Bottom Layer w0.5: v1(141.8,130.8) 142,131 142.071,131 145.571,134.5 J10.3
Mikro-m2-en2: J10.4 U7.28 | length 18.2
  Top Layer w0.5: U7.28 141.332,131.6 141.393,131.661 J10.4
Mikro-m3-en1: J12.3 U7.25 | length 25.7
  Top Layer w0.5: U7.25 v1(139.8,129.2) ; J12.3@147.336,140.336 J12.3
  Bottom Layer w0.5: v1(139.8,129.2) 139.8,131 142.45,133.65 142.45,135.45 J12.3
Mikro-m3-en2: J12.4 U7.31 | length 26.1
  Top Layer w0.5: U7.31 134.884,134 135.334,133.55 143.05,133.55 v1(148.5,139)
  Bottom Layer w0.5: v1@148.629,139.129 148.629,140.129 148.987,140.487 J12.4
Mootor1_en1: U1.9 U5.14 | length 19.2
  Top Layer w0.2: U5.14 115.405,98.903 122,92.308 122,90.84 120.35,89.19 120.35,88.501 119.874,88.025 119.525,88.025 U1.9
Mootor1_en2: U1.10 U5.13 | length 18.8
  Top Layer w0.2: U5.13 114.135,99.607 121.5,92.242 121.5,91.526 119.95,89.976 119.95,88.775 119.7,88.525 119.525,88.525 U1.10
Mootor2_en1: U2.9 U5.12 | length 7.3
  Top Layer w0.2: U2.9 112.425,96.6 112.774,96.6 113.15,96.976 113.15,100.658 112.975,100.833 112.975,103.165 U5.12
Mootor2_en2: U2.10 U5.11 | length 6.9
  Top Layer w0.2: U5.11 111.595,101.647 112.75,100.492 112.75,97.25 112.575,97.075 U2.10
Mootor3_en1: U3.9 U6.14 | length 13.1
  Top Layer w0.2: U6.14 126.905,92.029 128.967,89.967 128.967,85.318 128.674,85.025 128.325,85.025 U3.9
Mootor3_en2: U3.10 U6.13 | length 12.6
  Top Layer w0.2: U6.13 125.635,92.734 128.525,89.844 128.525,86.234 128.3,86.009 U3.10
Mootor_off: U1.8 U2.8 U3.8 U6.11 | length 38.3
  Top Layer w0.2: U2.8 116.925,96.075 v1(119,94) ; U1.8 120.309,87.5 120.75,87.941 120.75,89.024 123,91.274 v1(123,94) 123,94.058 123.095,94.153 U6.11 ; v1(128,93.5) 128,91.5 129.5,90 129.5,85.285 128.74,84.525 128.325,84.525 U3.8
  Bottom Layer w0.2: v1(119,94) 125.261,94 125.761,93.5 v1(128,93.5)
Mootor_sleep: U1.3 U2.3 U3.3 U6.12 | length 56.3
  Top Layer w0.2: v1(107.5,101) 107.5,97.609 109.009,96.1 109.575,96.1 U2.3 ; U1.3 115.974,87.5 115.4,86.926 114.6,86.926 114.3,87.226 114.3,88.374 114.676,88.75 115.674,88.75 116.3,89.376 116.3,92.042 117.258,93 v1(120,93) ; v1(124,93.45) 123.5,92.95 123.5,86.026 125.001,84.525 125.475,84.525 U3.3 ; v1@124,93.475 v1(124,94.525) ; v1@124,94.512 124.365,94.877 U6.12
  Bottom Layer w0.2: v1(107.5,101) 107.525,101.025 109.626,101.025 109.751,100.9 114.1,100.9 120.475,94.525 120.717,94.525 120.727,94.516 122.301,94.516 122.31,94.525 v1(124,94.525) ; v1(120,93) 120.45,93.45 v1(124,93.45)
NetC19_1: C19.1 J4.3x3_mm U1.5 | length 0
NetC19_2: C19.2 J1.3x3_mm U1.7 | length 0
NetC20_1: C20.1 J5.3x3_mm U2.5 | length 0
NetC20_2: C20.2 J2.3x3_mm U2.7 | length 0.2
  Top Layer w0.3: U2.7 U2.7@112.012,94.7 ; U2.7@112,94.754 U2.7@112.046,94.8
NetC21_1: C21.1 J6.3x3_mm U3.5
NetC21_2: C21.2 J3.3x3_mm U3.7
NetC47_1: C47.1 U8.6 | length 1.5
  Top Layer w0.2: U8.6 135.5,85.7 C47.1
NetC47_2: C47.2 L1.1 U8.5
NetC48_2: C48.2 R14.1 R15.2 U8.8 | length 4.3
  Top Layer w0.2: U8.8 U8.8@134.5,84.841
  Top Layer w0.3: C48.2 C48.2@133.225,87.475 ; R14.1@133.225,86.025 R14.1 ; R15.2 133.35,84.6 U8.8
  Top Layer w0.4: R14.1@133.225,86.025 C48.2@133.225,87.475 ; R15.2 R14.1@133.25,85.9
NetC50_1: C50.1 U8.7 | length 1.6
  Top Layer w0.2: C50.1@134.5,85.8 C50.1@134.55,85.8
  Top Layer w0.3: C50.1 134.55,85.9 135,85.45 U8.7
NetD1_2: D1.2 R10.1 | length 1.5
  Top Layer w0.254: D1.2 R10.1
NetD2_2: D2.2 R11.1 | length 1.5
  Top Layer w0.254: D2.2 R11.1
NetD3_2: D3.2 R12.1 | length 1.5
  Top Layer w0.254: D3.2 R12.1
NetD4_2: D4.2 R17.2 | length 1.5
  Top Layer w0.4: R17.2 D4.2
NetJ9_2: J9.2 U4.12 | length 6
  Top Layer w0.254: 102,106 102,106.299 102.416,106.715 102.416,109.149 102.365,109.2 U4.12
NetJ11_2: J11.2 U4.13 | length 15.8
  Top Layer w0.254: J11.2 103.452,105.306 103.635,105.489 U4.13
NetJ14_2: J14.2 U4.14 | length 27.5
  Top Layer w0.254: U4.14 104.905,95.595 105.5,95 105.5,90.411 107.686,88.224 107.686,87.127 J14.2
NetJ16_3x3_mm: J16.3x3_mm Q1.D | length 0.7
  Top Layer w2: J16.3x3_mm@154.5,86.5 J16.3x3_mm
NetR1_2: R1.2 U1.2 | length 1.7
  Top Layer w0.2: R1.2@115,88 U1.2
NetR2_2: R2.2 U2.2 | length 2.2
  Top Layer w0.2: R2.2 108.5,97.175 109.1,96.575 U2.2 U2.2@109.579,96.554
NetR3_2: R3.2 U3.2 | length 2.6
  Top Layer w0.2: R3.2@124.85,86.25 124.6,86.5 R3.2 124.5,85.651 125.126,85.025 125.475,85.025 U3.2
NetR4_2: R4.2 U1.13 | length 1.5
  Top Layer w0.2: R4.2@117.45,90.25 R4.2 117.575,90.25 117.825,90 117.825,89.05 U1.13
NetR5_2: R5.2 U2.13 | length 1.5
  Top Layer w0.2: R5.2 110.1,98.75 110.725,98.125 110.725,97.625 U2.13
NetR6_2: R6.2 U3.13 | length 2.1
  Top Layer w0.2: R6.2 126.1,87.75 126.65,87.2 U3.13
NetR7_2: R7.2 U1.12 | length 1.6
  Top Layer w0.2: U1.12@118.375,89.05 U1.12 118.35,89.7 118.9,90.25 R7.2
NetR8_2: R8.2 U2.12 | length 1.3
  Top Layer w0.2: U2.12@111.275,97.625 U2.12 111.25,98.5 R8.2
NetR9_2: R9.2 U3.12 | length 2.3
  Top Layer w0.2: U3.12 127.15,87.5 127.4,87.75 R9.2 R9.2@127.75,87.5
NetR13_1: R13.1 U8.2 | length 2
  Top Layer w0.2: R13.1 134.5,81.9 134.986,82.386 134.986,82.986 U8.2
NetR16_2: R16.2 U8.1 | length 1.7
  Top Layer w0.2: R16.2 R16.2@133.135,83.135
  Top Layer w0.3: R16.2 U8.1
NetU4_3: U4.3 U7.8 | length 27
  Top Layer w0.254: U4.3 104.905,118.905 v1(105.5,119.5) ; v1(109.766,123) v1(114.883,128.117) ; v1(120.5,136) 120.553,136 120.827,136.274 U7.8
  Bottom Layer w0.254: v1(105.5,119.5) 109,123 v1(109.766,123) ; v1(114.883,128.117) 114.883,130.383 v1(120.5,136)
NetU4_4: U4.4 U7.12 | length 23.8
  Top Layer w0.254: U4.4 v1(103.635,118.865) ; v1(109.06,123.84) 117.619,132.4 U7.12
  Bottom Layer w0.254: v1(103.635,118.865) 108.573,123.803 109.022,123.803 v1(109.06,123.84)
NetU4_5: U4.5 U7.11 | length 25.4
  Top Layer w0.254: U4.5 102.365,118.865 v1(102.5,119) ; v1(108.5,125) 116.7,133.2 U7.11
  Bottom Layer w0.254: v1(102.5,119) v1(108.5,125)
NetU5_3: U5.3 U7.5 | length 33.1
  Top Layer w0.254: U5.3 115.5,108.82 115.462,108.857 115.462,109.962 v1(115.5,110) ; v1(124,133.5) 124,133.553 124.1,133.653 U7.5
  Bottom Layer w0.254: v1(115.5,110) 117.235,111.735 117.235,115.444 118.052,116.261 118.052,130.833 120.667,133.448 123.729,133.448 123.743,133.462 123.962,133.462 v1(124,133.5)
NetU5_4: U5.4 U7.6 | length 33.4
  Top Layer w0.254: U5.4 v1(114.135,110.365) ; U7.6 123.3,134.253 123.5,134.053 v1(123.5,134)
  Bottom Layer w0.254: v1(114.135,110.365) 114.173,110.403 114.403,110.403 116.781,112.781 116.781,120.756 117.006,120.981 117.006,128.725 117.375,129.094 117.375,130.798 120.525,133.948 122.729,133.948 122.781,134 v1(123.5,134)
NetU5_5: U5.5 U7.7 | length 32.7
  Top Layer w0.254: U5.5 v1(112.865,110.365) ; v1(122.5,134.5) U7.7
  Bottom Layer w0.254: v1(112.865,110.365) 116.327,113.827 116.327,128.09 116.552,128.315 116.552,130.617 120.435,134.5 v1(122.5,134.5)
NetU5_6: U5.6 U7.20 | length 29.3
  Top Layer w0.254: v1(110.5,112.5) 110.5,111.5 111.595,110.405 U5.6 ; v1(110.5,117.5) 110.5,119 117.5,126 v1(120,126) ; v1(123.052,129) 123.09,128.962 123.456,128.962 123.977,128.442 123.977,127.85 U7.20
  Bottom Layer w0.254: v1(110.5,112.5) v1(110.5,117.5) ; v1(120,126) 123,129 v1(123.052,129)
NetU6_3: U6.3 U7.19 | length 28.1
  Top Layer w0.254: v1(122.948,120.5) 122.948,124.448 123.3,124.8 U7.19 ; v1(124.948,104) 124.96,103.988 125.606,103.988 126.905,102.689 U6.3
  Bottom Layer w0.254: v1(122.948,120.5) 122.469,120.021 122.469,107.531 124.986,105.014 124.986,104.038 v1(124.948,104)
NetU6_4: U6.4 U7.18 | length 28.1
  Top Layer w0.254: v1(122.251,125.5) 122.251,125.553 122.5,125.802 U7.18 ; v1(124.298,104) 124.336,103.962 124.336,103.832 124.867,103.3 125.024,103.3 125.635,102.689 U6.4
  Bottom Layer w0.254: v1(122.251,125.5) 122.251,125.45 121.5,124.699 121.5,106.219 123.692,104.027 124.271,104.027 v1(124.298,104)
NetU6_5: U6.5 U7.13 | length 33.1
  Top Layer w0.254: U7.13 v1(121.4,131.6) ; v1(123.5,105) 123.5,103.5 124.171,102.829 124.225,102.829 124.365,102.689 U6.5
  Bottom Layer w0.254: v1(121.4,131.6) 123.604,129.396 123.604,128.771 122.803,127.97 122.803,125.271 122.5,124.968 122.5,121.033 122,120.533 122,106.5 v1(123.5,105)
NetU6_6: U6.6 U7.26 | length 35.3
  Top Layer w0.254: v1(122.538,103.246) 123.095,102.689 U6.6 ; v1(127.5,130) U7.26
  Bottom Layer w0.254: v1(122.538,103.246) 122.784,103 125,103 125.5,103.5 125.5,105.5 122.923,108.077 122.923,117.59 123.604,118.271 123.604,126.104 v1(127.5,130)
USB_D_N: J15.2 U7.21 U9.4 | length 25.3
  Top Layer w0.26: U7.21 125.02,127.606 125.02,127.074 125.07,127.025 125.07,123.225 125.07,115.261 122.334,112.525 122.334,110.592 123.314,109.612 123.314,109.13 123.484,108.96 123.654,109.13 123.654,109.854 124,110.2 126.159,110.2 126.204,110.245 126.628,110.245 126.653,110.22 127.255,110.22 J15.2
USB_D_P: J15.3 U7.22 U9.3 | length 23
  Top Layer w0.15: U7.22@125.7,127.297 U7.22
  Top Layer w0.26: U7.22 125.58,127.606 125.58,127.074 125.53,127.025 125.53,123.415 125.53,115.07 122.794,112.334 122.794,111.652 122.946,111.5 123.484,111.5 123.654,111.33 123.654,110.846 123.84,110.66 125.969,110.66 126.014,110.705 126.628,110.705 126.653,110.73 127.255,110.73 J15.3
VCC: C1.1 C2.1 C3.1 C4.1 C5.1 C6.1 C7.1 C8.1 C9.1 C10.1 C11.1 C12.1 C13.1 C14.1 C15.1 C16.2 C17.2 C18.2 C35.1 C36.1 C37.1 C38.1 C39.1 C45.1 C53.1 J19.3x3_mm Q1.S R13.2 U1.4 U2.4 U3.4 U8.3 | length 8.5
  Top Layer w0.3: v1(119,87) U1.4@119.029,86.971 ; v1(127.5,84) 128.45,84 v1(128.5,83.95) ; C18.2@130.45,84.25 v1(130.5,84.2)
  Top Layer w0.4: C17.2@107.9,95.6 v1(108,95.6) ; C17.2@108,95.7 108,95.65 108.1,95.55 109.95,95.55 v1(110,95.5) ; U1.4@119.029,86.971 v1(120.971,86.971) ; v1(128.5,83.95) 130.25,83.95 v1(130.5,84.2)
  Top Layer w0.5: v1(120.971,86.971) 121.371,86.971 C16.2 ; C45.1@136,81.45 v1(136,81.5)
  Bottom Layer w0.5: C4.1 C4.1@122.05,86.7
  Bottom Layer w1: C6.1@115.8,95.3 115.95,95.3 C6.1@116.05,95.2 ; C14.1 C14.1@125.65,83.75
  other v1: 137,70 138,70 139,70 141,70.5 143,70.5 145,70.5 137,71 138,71 139,71 141,71.5 143,71.5 145,71.5 146.5,71.5 137,72 138,72 139,72 141,72.5 148,72.5 149.5,72.5 137,73.5 138,73.5 139,73.5 141,73.5 148,73.5 149.5,73.5 139,74.5 141,74.5 148,74.5 149.5,74.5 139,75.5 141,75.5 148,75.5 149.5,75.5 139,76.5 141,76.5 146.5,76.5 148,76.5 149.5,76.5 139,77.5 141,77.5 143,77.5 145,77.5 146.5,77.5 148,77.5 149.5,77.5 137,78.25 134.5,78.5 135.5,78.5 139,78.5 141,78.5 143,78.5 145,78.5 146.5,78.5 148,78.5 149.5,78.5 134.5,79.5 135.5,79.5 139,79.75 141,79.75 145,79.75 136.5,80 137.5,80 146.5,80 148,80 149.75,80 135.5,80.5 148,82 149.365,82.047 150.635,82.047 126.5,84 117,86.95 118,86.975 111,95.5 112,95.5
pads on no net: H1.q H2.q H3.q J7.06 J7.07 J7.08 J8. J9. J9.4 J10. J11. J11.4 J12. J13. J13.3 J14. J14.3 J14.4 J15.4 J15.8 J15.11 U1.1 U2.1 U3.1 U4.6 U4.7 U4.11 U5.7 U6.7 U9.1 U10.4

## Polygon pours and split planes (outlines as drawn)
VCC on Top Layer "VCC_L01_P035" (solid, remove dead copper, pour order 35): 151,81 151,83 147.5,83 147.5,80.5 136.75,80.5 135.437,83.125 135,80.5 134,80.5 134,77.5 138,77.5 138,74 136,74 136,69 150,69 150,78.5 150.5,79 150.5,81
NetC21_2 on Top Layer "NETC21_2_L01_P013" (solid, remove dead copper, pour order 13): 131,83.5 131,76.5 127.5,76.5 127.5,81 129.5,81 129.5,83 127.5,83 127.5,83.5 127.5,83 127.5,83.5
GND_M on Top Layer "GND_M_L01_P032" (solid, remove dead copper, pour order 32): 136,83.5 136.5,83.5 137,84 147,84 147,80.5 137,80.5 137,81.5 136,82.5 136.001,82.501
+5V on Top Layer "+5V_L01_P030" (solid, remove dead copper, pour order 30): 132,90 132,93 141.5,93 143.5,91 143.5,89 138,89 138,89.5 136,89.5 136,90
VCC on Top Layer "VCC_L01_P021" (solid, remove dead copper, pour order 21): 136.5,69.5 136.5,79 150.5,79 150.5,69.5
NetC21_1 on Top Layer "NETC21_1_L01_P012" (solid, remove dead copper, pour order 12): 127,83 127,83.5 123.5,83.5 123.5,76.5 127,76.5 127,81 126,81 125,81 125,83
NetC19_2 on Top Layer "NETC19_2_L01_P011" (solid, remove dead copper, pour order 11): 118.5,86.5 121.5,86.5 121.5,79.5 118,79.5 118,84 120,84 120,86 118.5,86
NetC20_2 on Top Layer "NETC20_2_L01_P009" (solid, remove dead copper, pour order 9): 111.5,94.5 111.5,95 116,95 116,89.5 113,89.5 111.5,89.5 111.5,92.5 113,92.5 113,94.5
NetC20_1 on Top Layer "NETC20_1_L01_P008" (solid, remove dead copper, pour order 8): 110.5,94.5 110.5,95 106.5,95 106.5,89.5 110,89.5 111.5,89.5 111.5,91 111.5,92.5 109.054,92.5 109.054,94.5
NetC47_2 on Top Layer "NETC47_2_L01_P018" (solid, remove dead copper, pour order 18): 136,84 136,85 136.5,85 136.5,86.5 138,86.5 138,87 144,87 144,84
NetC19_1 on Top Layer "NETC19_1_L01_P010" (solid, remove dead copper, pour order 10): 118,86 118,86.5 114.5,86.5 114.5,79.5 118,79.5 118,84 116,84 116,86
NetJ16_3x3_mm on Top Layer "NETJ16_3X3_MM_L01_P015" (solid, remove dead copper, pour order 15): 147.5,87.5 156.5,87.5 156.5,84.5 148.5,84.5 148.5,86.5 147.5,86.5
+5V_USB on Bottom Layer "+5V_USB_L04_P028" (solid, remove dead copper, pour order 28): 141,126 126,126 126,106 141.5,106
GND_M on Bottom Layer "GND_M_L04_P022" (solid, remove dead copper, pour order 22): 132.5,83 132.5,73 135.5,73 135.5,67 94.5,67 94.5,112.5 107.5,112.5 107.5,94.5 117,94.5 117,91.5 113,91.5 113,86 123,86 123,83
VCC on Bottom Layer "VCC_L04_P023" (solid, remove dead copper, pour order 23): 108,104 108,94.5 117,94.5 117,91 113.5,91 113.5,86 123,86 123,83 133,83 133,73.5 136,73.5 136,67.5 163.5,67.5 163.5,94.5 141,94.5 141,97 137.5,97 136.965,97.535 118.535,97.535 118.5,97.5 118,98 118,104
GND on GND "GND_L02_P024" (solid, remove dead copper, pour order 24): 93.5,116.5 108.5,116.5 108.5,108 120,108 120,101.5 165,101.5 165,148.5 94,148.5
GND_M on GND "GND_M_L02_P025" (solid, remove dead copper, pour order 25): 93.5,112.5 108,112.5 107.5,112 107.5,104 118.5,104 118.5,97.5 164.5,97.5 164.5,68 93.5,68
GND on GND_M "GND_L03_P027" (solid, remove dead copper, pour order 27): 94,148.5 93.5,148 93.5,116.5 108.5,116.5 108.5,108 120,108 120,101.5 164.5,101.5 164,102 164,148.5 93.5,148.5
GND_M on GND_M "GND_M_L03_P026" (solid, remove dead copper, pour order 26): 93.5,112.5 93.5,68 164.5,68 164.5,97.5 118.5,97.5 118.5,104 107.5,104 107.5,112.5

## Silkscreen, mask and mechanical layers (free items; w line width, h text height)
Top Overlay:
  lines w0.2: 125.151,121.523 126.5,122.872 126.5,123 125.226,124.274 125.226,124.542 ; 128.274,141.958 127,143.232 127,143.5 128.349,144.849 128.349,144.977 ; 151.814,137.154 153.5,138.839 153.5,139 151.74,140.76 151.908,140.927
  lines w0.254: 106.653,134.156 109.098,131.711 ; 106.653,134.417 cw(c109.098,131.457) 106.509,128.622 109.098,131.21 ; 108.389,115.187 108.389,115.434 ; 109,131.246 109,131.5 109,131.253 ; 114.889,124.187 114.889,123.933 117.334,121.488 ; 114.889,124.434 117.478,127.022 ; 117.334,121.35 cw(c114.889,124.31) 117.478,127.146 ; 125.151,121.523 ccw(c126.5,123) 125.226,124.542 ; 128.274,141.958 cw(c127,143.5) 128.349,144.977 ; 134.902,132.043 134.902,131.789 137.347,129.344 ; 134.902,132.29 137.491,134.878 ccw(c134.902,132.043) 137.347,129.083 ; 151.814,137.154 ccw(c153.5,139) 151.908,140.927
  text "m_3" at 140.153,144.32 h1
  text "m_1" at 104.354,130.823 h1 r50
  text "m_2" at 142.034,128.353 h1 r20
  text "Pl_H" at 96.32,108.847 h1 r270
  text "Pl_S" at 104.353,100.466 h1 r290
  text "M_2" at 110.343,87.588 h1 r310
  text "Toide" at 153.153,83.153 h1
  text "Viskaja" at 109.305,78.971 h1 r40
  text "M_1" at 117.153,77.82 h1
  text "Kivipallur-jurto" at 114.376,77.345 h1 r330
  text "M_3" at 125.653,74.82 h1
  text "Viskaja" at 132.153,73.986 h1
Mechanical 1:
  lines w0.254: 59.182,25.654 59.309,25.527

## Text inside footprints (layer, text, board x,y; h text height)
U4: Top Overlay "*" at 107.851,117.796 h1.27 r270; Mechanical 13 "*" at 106.607,116.43 h1.27 r270
U5: Top Overlay "*" at 118.351,109.296 h1.27 r270; Mechanical 13 "*" at 117.107,107.93 h1.27 r270
U6: Top Overlay "*" at 129.851,102.796 h1.27 r270; Mechanical 13 "*" at 128.607,101.43 h1.27 r270
U7: Top Overlay "*" at 129.453,137.969 h1.27 r270; Mechanical 13 "*" at 127.065,135.531 h1.27 r270